# EAGLE board RFBoardLayoutGen0_v03.1 (EAGLE 7.2.0)
AUTHOR: Kirchschlager Raimund
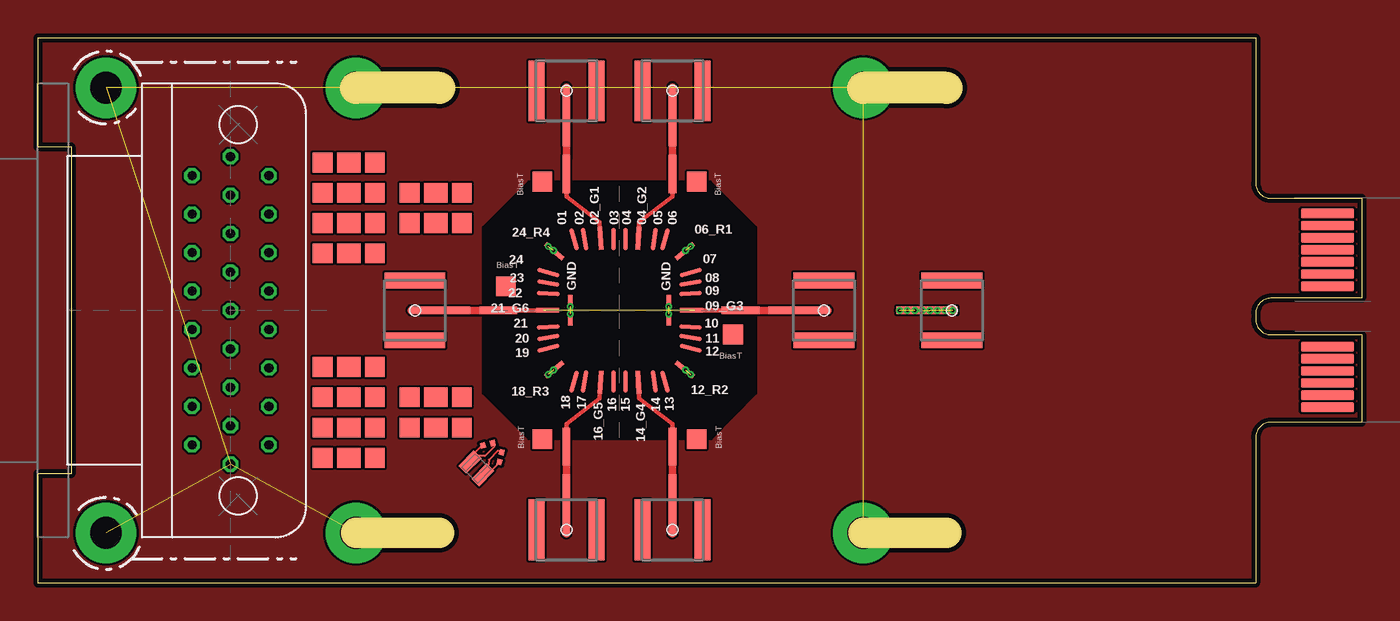
[diagram p0: board, top side]
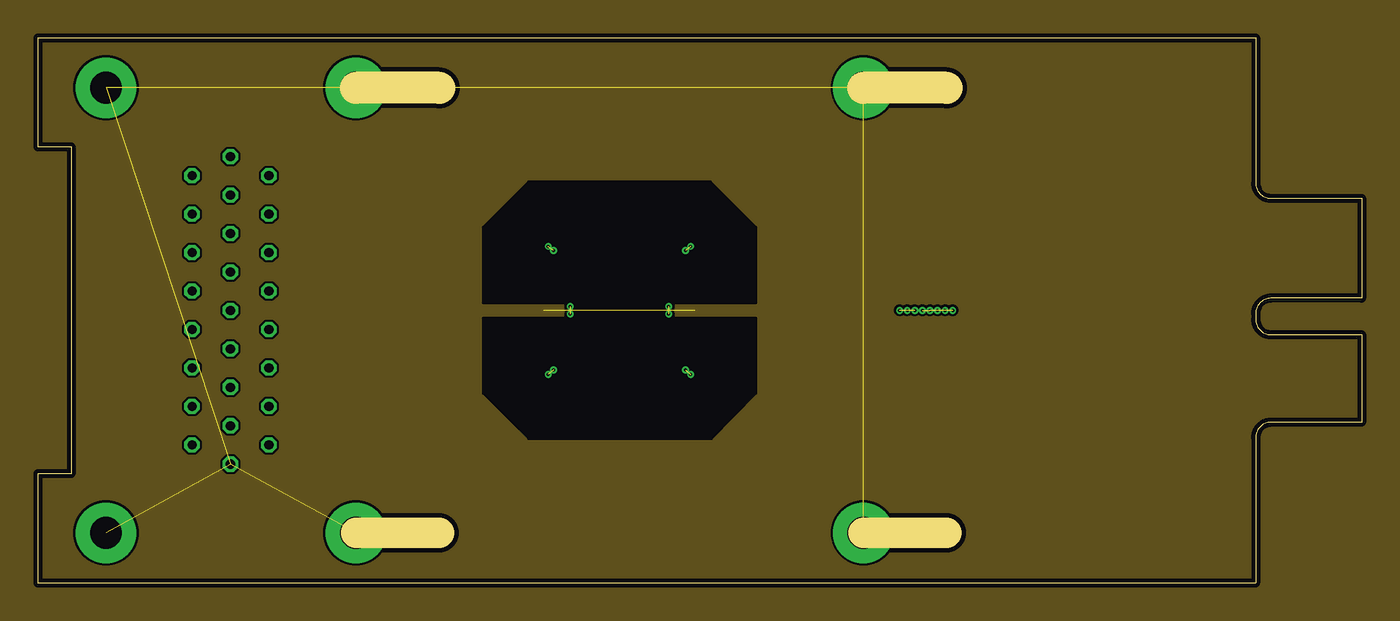
[diagram p1: board, inner layer Route2]
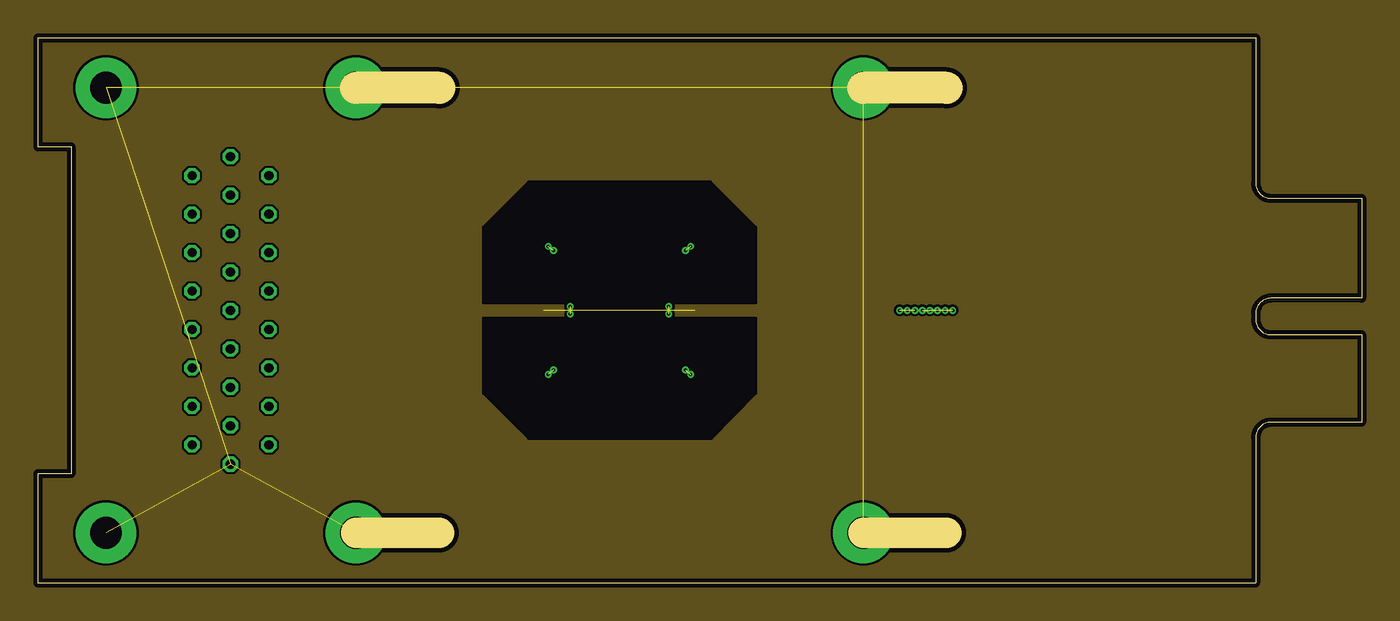
[diagram p2: board, inner layer Route3]
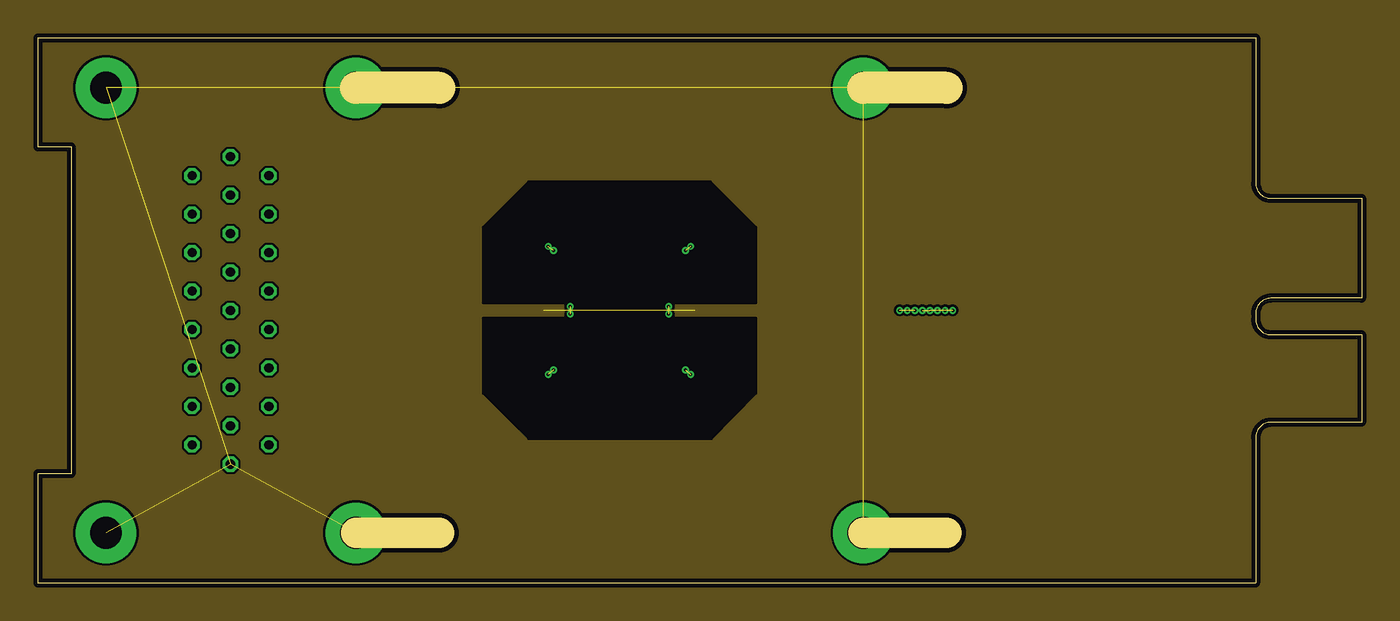
[diagram p3: board, inner layer Route14]
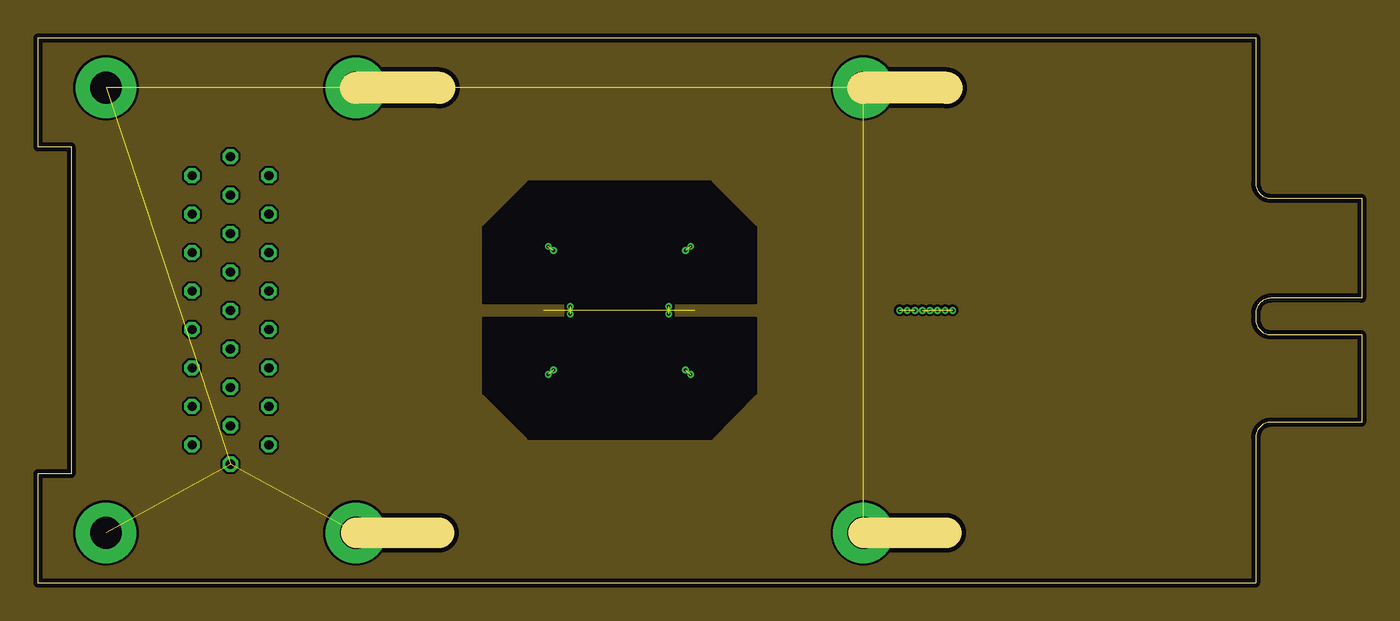
[diagram p4: board, inner layer Route15]
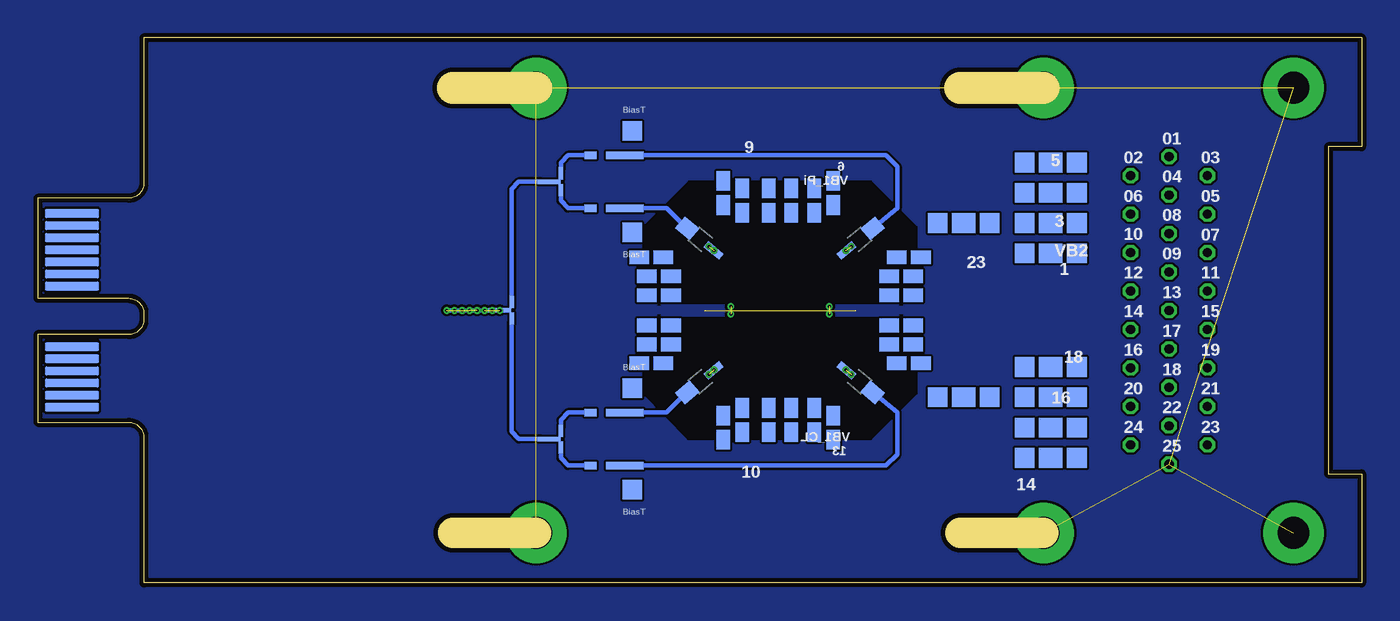
[diagram p5: board, bottom side, seen from below]

Size 87.4 x 36 mm. Coordinates in mm from the lower left corner, seen from the top.
Outline: 26.5,3.3 21,3.3
Outline: 26.5,32.7 21,32.7
Outline: 60,32.7 54.5,32.7
Outline: 60,3.3 54.5,3.3
Outline: 0,36 0,28.8 2.2,28.8 2.2,7.2 0,7.2 0,0 80.4,0 80.4,9.6 arc-90 81.4,10.6 87.4,10.6 87.4,16.4 81.4,16.4 arc-90 80.4,17.4 80.4,17.8 arc-90 81.4,18.8 87.4,18.8 87.4,25.4 81.4,25.4 arc-90 80.4,26.4 80.4,36 0,36
Copper layers (1+2+3*14+15+16): Top 0.035mm / dielectric 0.2mm / Route2 0.035mm / dielectric 0.36mm / Route3 0.035mm / dielectric 0.28mm / Route14 0.035mm / dielectric 0.36mm / Route15 0.035mm / dielectric 0.2mm / Bottom 0.035mm
Design rules "PCB-POOL HighSpec_ML6+": minimum track width 0.125mm, minimum drill 0.2mm, track to track 0.125mm, track to pad 0.125mm, pad to pad 0.125mm, via to via 0.125mm, smd to smd 0.125mm, copper to edge 0.3mm, drill to drill 0.2mm, minimum pad ring 0.2mm, minimum via ring 0.125mm, stop-mask expansion 0.075mm, vias tented up to drill 0.3mm, thermal gap 0.2mm
Net classes: 0 GND: clearance 0.15 mm; 1 RF: clearance 2 mm
tRestrict: area 29.4,9.5 to 47.4,26.5

## Footprints (pad centres in the part's own frame; a part is rotated, then mirrored left to right if it is on the bottom)
24DC+10RF/400MU-PADS/0.7X0.7_V1.0 = smd 1.5 x 0.3 rotated 40: P$1 -4.3,-3.9; P$2 4.3,3.9 | smd 1.5 x 0.3 rotated 140: P$3 -4.3,3.9; P$7 4.3,-3.9 | smd 1.5 x 0.3 rotated 165: P$4 4.7,-2.5 | smd 1.5 x 0.3 rotated 93: P$5 -1.25,4.75 | smd 1.5 x 0.3 rotated 171: P$6 4.7,-1.8 | smd 1.5 x 0.3: P$8 -4.75,0; P$23 4.75,0 | smd 1.5 x 0.3 rotated 177: P$9 4.7,-1.1 | smd 0.3 x 1.5: P$10 -0.4,4.7; P$14 -0.4,-4.7; P$19 0.4,-4.7; P$40 0.4,4.7 | smd 1.5 x 0.3 rotated 285: P$11 3,-4.7 | smd 1.5 x 0.3 rotated 87: P$12 1.25,4.75 | smd 1.5 x 0.3 rotated 279: P$13 2.3,-4.7 | smd 1.5 x 0.3 rotated 261: P$15 -2.3,-4.7 | smd 1.5 x 0.3 rotated 255: P$16 -3,-4.7 | smd 1.5 x 0.3 rotated 273: P$17 1.25,-4.75 | smd 1.5 x 0.3 rotated 267: P$18 -1.25,-4.75 | smd 1.5 x 0.3 rotated 183: P$20 4.7,1.1 | smd 1.5 x 0.3 rotated 189: P$21 4.7,1.8 | smd 1.5 x 0.3 rotated 195: P$22 4.7,2.5 | smd 0.3 x 2: P$24 -3.25,0; P$32 3.25,0 | smd 1.5 x 0.3 rotated 345: P$26 -4.7,2.5 | smd 1.5 x 0.3 rotated 351: P$27 -4.7,1.8 | smd 1.5 x 0.3 rotated 357: P$28 -4.7,1.1 | smd 1.5 x 0.3 rotated 3: P$29 -4.7,-1.1 | smd 1.5 x 0.3 rotated 9: P$30 -4.7,-1.8 | smd 1.5 x 0.3 rotated 15: P$31 -4.7,-2.5 | smd 1.5 x 0.3 rotated 105: P$38 -3,4.7 | smd 1.5 x 0.3 rotated 99: P$39 -2.3,4.7 | smd 1.5 x 0.3 rotated 81: P$41 2.3,4.7 | smd 1.5 x 0.3 rotated 75: P$42 3,4.7
25_SOCKET_M83513/13-D = drill 0.6 octagon: 01 10.16,0; 02 8.89,2.54; 03 6.35,2.54; 04 3.81,2.54; 05 2.54,0; 06 1.27,2.54; 07 0,0; 08 -1.27,2.54; 09 -2.54,0; 10 -3.81,2.54; 11 -6.35,2.54; 12 -8.89,2.54; 13 -10.16,0; 14 8.89,-2.54; 15 7.62,0; 16 6.35,-2.54; 17 5.08,0; 18 3.81,-2.54; 19 1.27,-2.54; 20 -1.27,-2.54; 21 -3.81,-2.54; 22 -5.08,0; 23 -6.35,-2.54; 24 -7.62,0; 25 -8.89,-2.54
MEC8-113-02-L-D-RA1 = smd 0.6 x 3.5: 129 -6.4,0.15; 130 -5.6,0.15; 131 -4.8,0.15; 132 -4,0.15; 133 -3.2,0.15; 134 -2.4,0.15; 135 -1.6,0.15; 136 2.4,0.15; 137 3.2,0.15; 138 4,0.15; 139 4.8,0.15; 140 5.6,0.15; 141 6.4,0.15 | smd 0.6 x 3.5 bottom: 157 -6.4,0.15; 158 -5.6,0.15; 159 -4.8,0.15; 160 -4,0.15; 161 -3.2,0.15; 162 -2.4,0.15; 163 -1.6,0.15; 168 2.4,0.15; 169 3.2,0.15; 170 4,0.15; 171 4.8,0.15; 172 5.6,0.15; 173 6.4,0.15
LP-FILTER/1_STAGE/OS/0603_TOP = smd 1.3 x 1.3: $1 1.85,0.01; $6 -1.6,0.01 | smd 1.55 x 1.3: $4 0.125,0.01
BIAS_TEE_UP_0603 = smd 1.3 x 1.3: P$1 0,-1.6 | smd 2.5 x 0.5: P$2 0.5,0
SMP_STRAIGHT_MINI = smd 0.5 x 4: 1 0,1.653 | smd 1.05 x 4: 2@1 -1.975,0; 2@2 1.975,0
BIAS_TEE_DOWN_0603 = smd 1.3 x 1.3: P$1 0,1.6 | smd 2.5 x 0.5: P$2 0.5,0
L_MATCH = smd 1.3 x 0.5: $1 -1.15,0 | smd 1.25 x 1: $3 1.125,0
LP-FILTER/1_STAGE/OS/0603_BOTTOM = smd 1.3 x 1.3 bottom: $1 -1.6,0.01; $6 1.85,0.01 | smd 1.55 x 1.3 bottom: $4 0.125,0.01
SMD0.8-0,5 = smd 0.8 x 0.5: 1 0,0
LP-FILTER/CAPACITOR/0603_BOTTOM = smd 1.3 x 0.9 bottom: $1 -0.8,0; $6 0.8,0
RX-BR_V1 = smd 1.422 x 0.711 rotated 45: P$2 -0.02,-0.87; P$3 -0.87,-0.02 | smd 0.406 x 0.406 rotated 165: P$5 1.23,0.63; P$8 1.08,-0.02 | smd 0.406 x 0.406 rotated 105: P$6 0.63,1.23; P$7 -0.02,1.08
T_JUNCTION_0.3MM = smd 0.3 x 1.5 bottom: P$1 0,-0.75 | smd 0.8 x 0.3 bottom: P$2 -0.55,0.03; P$3 0.55,0.03 | smd 1 x 0.12 bottom: P$4 0,-0.06

## Placement (x,y rotation side)
E$1  [24DC+10RF/400MU-PADS/0.7X0.7_V1.0]  38.4,18 0 top
E$2  [25_SOCKET_M83513/13-D]  12.71,18 90 top
E$3  [MEC8-113-02-L-D-RA1]  85,18 270 top
E$4  [LP-FILTER/1_STAGE/OS/0603_TOP]  20.4,27.75 0 top
E$5  [LP-FILTER/1_STAGE/OS/0603_TOP]  20.4,25.75 0 top
E$6  [LP-FILTER/1_STAGE/OS/0603_TOP]  20.4,23.75 0 top
E$7  [LP-FILTER/1_STAGE/OS/0603_TOP]  20.4,21.75 0 top
E$8  [LP-FILTER/1_STAGE/OS/0603_TOP]  20.4,14.25 0 top
E$9  [BIAS_TEE_UP_0603]  34.9,9.5 270 top
E$10  [SMP_STRAIGHT_MINI]  51.9,18 90 top
E$11  [LP-FILTER/1_STAGE/OS/0603_TOP]  20.4,12.25 0 top
E$12  [SMP_STRAIGHT_MINI]  24.9,18 270 top
E$13  [LP-FILTER/1_STAGE/OS/0603_TOP]  20.4,10.25 0 top
E$14  [LP-FILTER/1_STAGE/OS/0603_TOP]  20.4,8.25 0 top
E$15  [BIAS_TEE_UP_0603]  30.9,18 180 top
E$16  [BIAS_TEE_DOWN_0603]  41.9,9.5 270 top
E$17  [LP-FILTER/1_STAGE/OS/0603_TOP]  26.15,25.75 0 top
E$18  [LP-FILTER/1_STAGE/OS/0603_TOP]  26.15,10.25 0 top
E$19  [L_MATCH]  33.14,22.7 40 bottom
E$20  [LP-FILTER/1_STAGE/OS/0603_BOTTOM]  20.4,27.75 0 top
E$21  [LP-FILTER/1_STAGE/OS/0603_BOTTOM]  20.4,25.75 0 top
E$22  [LP-FILTER/1_STAGE/OS/0603_BOTTOM]  20.4,23.75 0 top
E$23  [LP-FILTER/1_STAGE/OS/0603_BOTTOM]  20.4,21.75 0 top
E$24  [LP-FILTER/1_STAGE/OS/0603_BOTTOM]  20.4,14.25 0 top
E$25  [LP-FILTER/1_STAGE/OS/0603_BOTTOM]  20.4,12.25 0 top
E$26  [SMP_STRAIGHT_MINI]  60.35,18 90 top
E$27  [L_MATCH]  33.14,13.3 320 bottom
E$28  [BIAS_TEE_UP_0603]  48.15,11.25 180 bottom
E$29  [SMP_STRAIGHT_MINI]  34.9,3.5 0 top
E$30  [SMD0.8-0,5]  50.9,11.25 0 bottom
E$31  [BIAS_TEE_DOWN_0603]  34.9,26.5 90 top
E$32  [SMP_STRAIGHT_MINI]  34.9,32.5 180 top
E$33  [SMP_STRAIGHT_MINI]  41.9,3.5 0 top
E$34  [BIAS_TEE_UP_0603]  41.9,26.5 90 top
E$35  [LP-FILTER/CAPACITOR/0603_BOTTOM]  34.9,25.75 270 top
E$36  [SMP_STRAIGHT_MINI]  41.9,32.5 180 top
E$37  [BIAS_TEE_UP_0603]  45.9,18 0 top
E$38  [LP-FILTER/CAPACITOR/0603_BOTTOM]  36.15,25.25 270 top
E$39  [LP-FILTER/CAPACITOR/0603_BOTTOM]  37.65,25.25 270 top
E$40  [RX-BR_V1]  29.4,8 0 top
E$41  [LP-FILTER/CAPACITOR/0603_BOTTOM]  29.9,21.5 180 top
E$42  [LP-FILTER/CAPACITOR/0603_BOTTOM]  30.4,20.25 180 top
E$43  [LP-FILTER/CAPACITOR/0603_BOTTOM]  39.15,25.25 270 top
E$44  [LP-FILTER/CAPACITOR/0603_BOTTOM]  30.4,19 180 top
E$45  [LP-FILTER/CAPACITOR/0603_BOTTOM]  30.4,17 180 top
E$46  [LP-FILTER/CAPACITOR/0603_BOTTOM]  30.4,15.75 180 top
E$47  [LP-FILTER/CAPACITOR/0603_BOTTOM]  29.9,14.5 180 top
E$48  [T_JUNCTION_0.3MM]  52.9,9.5 90 top
E$49  [LP-FILTER/CAPACITOR/0603_BOTTOM]  40.9,25.25 270 top
E$50  [T_JUNCTION_0.3MM]  56.15,18 90 top
E$51  [T_JUNCTION_0.3MM]  52.9,26.5 90 top
E$52  [BIAS_TEE_DOWN_0603]  48.15,7.75 180 bottom
E$53  [LP-FILTER/CAPACITOR/0603_BOTTOM]  42.15,25.75 270 top
E$54  [L_MATCH]  43.66,13.3 220 bottom
E$55  [BIAS_TEE_UP_0603]  48.15,28.25 180 bottom
E$56  [L_MATCH]  43.66,22.7 140 bottom
E$57  [SMD0.8-0,5]  50.9,7.75 0 bottom
E$58  [SMD0.8-0,5]  50.9,11.25 0 bottom
E$59  [BIAS_TEE_DOWN_0603]  48.15,24.75 180 bottom
E$60  [LP-FILTER/CAPACITOR/0603_BOTTOM]  34.9,10.25 270 top
E$61  [LP-FILTER/CAPACITOR/0603_BOTTOM]  36.15,10.75 270 top
E$62  [SMD0.8-0,5]  50.9,24.75 0 bottom
E$63  [SMD0.8-0,5]  50.9,28.25 0 bottom
E$64  [LP-FILTER/CAPACITOR/0603_BOTTOM]  37.65,10.75 270 top
E$65  [LP-FILTER/CAPACITOR/0603_BOTTOM]  39.15,10.75 270 top
E$66  [LP-FILTER/CAPACITOR/0603_BOTTOM]  40.9,10.75 270 top
E$67  [LP-FILTER/CAPACITOR/0603_BOTTOM]  42.15,10.25 270 top
E$68  [LP-FILTER/CAPACITOR/0603_BOTTOM]  46.9,21.5 180 top
E$69  [LP-FILTER/CAPACITOR/0603_BOTTOM]  46.4,20.25 180 top
E$70  [LP-FILTER/CAPACITOR/0603_BOTTOM]  46.4,19 180 top
E$71  [LP-FILTER/CAPACITOR/0603_BOTTOM]  46.4,17 180 top
E$72  [LP-FILTER/CAPACITOR/0603_BOTTOM]  46.4,15.75 180 top
E$73  [LP-FILTER/CAPACITOR/0603_BOTTOM]  46.9,14.5 180 top
E$74  [LP-FILTER/1_STAGE/OS/0603_BOTTOM]  20.4,10.25 0 top
E$75  [LP-FILTER/1_STAGE/OS/0603_BOTTOM]  20.4,8.25 0 top
E$76  [LP-FILTER/1_STAGE/OS/0603_TOP]  26.15,23.75 0 top
E$77  [LP-FILTER/1_STAGE/OS/0603_BOTTOM]  26.15,12.25 0 top
E$78  [LP-FILTER/1_STAGE/OS/0603_BOTTOM]  26.15,12.25 0 top
E$79  [LP-FILTER/1_STAGE/OS/0603_BOTTOM]  26.15,23.75 0 top
E$80  [LP-FILTER/1_STAGE/OS/0603_TOP]  26.15,12.25 0 top
E$81  [LP-FILTER/1_STAGE/OS/0603_BOTTOM]  26.15,23.75 0 top

## Library data of the parts
E$1 = SampleArea
E$2 = Glenair
E$3 = MEC8-130-02-X-D-RA1
E$4-E$8 E$11 E$13 E$14 E$17 E$18 E$20-E$25 E$35 E$38 E$39 E$41-E$47 E$49 E$53 E$60 E$61 E$64-E$81 = LPFilter
E$9 E$15 E$16 E$28 E$31 E$34 E$37 E$52 E$55 E$59 = Bias tee
E$10 E$12 E$26 E$29 E$32 E$33 E$36 = RF Connectors
E$19 E$27 E$54 E$56 = MatchCircuit
E$30 E$57 E$58 E$62 E$63 = PADS
E$40 = TempSensors
E$48 E$50 E$51 = RF layout parts

## Nets
S$2 [RF]: E$63.1
S$17 [RF]: E$62.1
S$67: E$2.24
S$76: E$2.11
S$80: E$2.12
S$81 [RF]: E$58.1
S$83: E$2.23
S$84 [RF]: E$57.1
S$85: E$2.25
S$88: E$2.01
S$90: E$2.10
S$95: E$2.22
S$144: E$2.14
S$146: E$2.02
S$149: E$2.15
S$151: E$2.03
S$154: E$2.09
S$156: E$2.21
S$158: E$2.08
S$160: E$2.20
S$162: E$2.16
S$163 [RF]: E$1.P$12
S$168: E$2.17
S$170: E$2.05
S$171: E$2.07
S$174: E$2.13
S$175: E$2.06
S$178: E$2.18
S$183: E$3.168
S$190: E$3.130

## Tracks (layer width: path | path; a pad name or v marks a point on that pad's centre or on a via)
GND1
  pour Top (rank 6): -4.85,39.6 92.1,39.7 92.1,-4.7 -4.85,-4.8
  pour Route2 (rank 6): -7.5,41.1 92.6,41.6 92.6,-5.15 -7.5,-5.65
  pour Route15 (rank 6): -11.25,44.5 94.9,44.5 94.9,-11.4 -11.25,-11.4
  pour Bottom (rank 6): -16.65,49.3 97.15,49.2 97.15,-15.85 -16.65,-15.75
  pour Route3 (rank 6): -15.4,47.8 96.4,47.8 96.4,-13.85 -15.4,-13.75
  pour Route14 (rank 6): -12.9,45.3 95.9,45.2 95.9,-12.85 -12.9,-12.75
S$1  (via drill 0.2)  (6 unrouted)
  Bottom 0.3: v56.9,18 v60.4,18
  other vias: 57.4,18 57.9,18 58.4,18 58.9,18 59.4,18 59.9,18
S$2
  Bottom 0.3: E$63.1 52.4,28.25 52.87,27.75 52.87,27.25
S$12
  Bottom 0.3: 49.65,24.75 45.9,24.75 44.65,23.5
S$17
  Bottom 0.3: 52.87,25.75 52.87,25.25 52.4,24.75 E$62.1
S$55
  Bottom 0.3: 54.15,26.5 55.65,26.5 56.12,26 56.12,18.75
S$68
  Bottom 0.3: 49.65,28.25 31.4,28.25 30.65,27.5 30.65,24.75 32.15,23.5
S$79
  Bottom 0.3: 49.65,11.25 45.9,11.25 44.65,12.5
S$81
  Bottom 0.3: E$58.1 52.4,11.25 52.87,10.75 52.87,10.25
S$82
  Top 0.5: 60.4,18 56.9,18
S$84
  Bottom 0.3: E$57.1 52.4,7.75 52.87,8.25 52.87,8.75
S$86
  Bottom 0.3: 54.15,9.5 55.65,9.5 56.12,10 56.12,17.25
S$89
  Bottom 0.3: 49.65,7.75 31.4,7.75 30.65,8.5 30.65,11.25 32.15,12.5
S$91
  Top 0.5: 24.65,18 29.65,18
S$116
  Top 0.5: 52.15,18 47.15,18
S$145
  Top 0.5: 34.9,32.75 34.9,28
S$147
  Top 0.5: 41.9,32.75 41.9,28
S$150
  Top 0.5: 34.9,3.25 34.9,8
S$152
  Top 0.5: 41.9,3.25 41.9,8
S$155
  Top 0.3: 34.9,28 34.9,25.5 37.09,23.83 37.15,22.75
S$157
  Top 0.3: 37.15,13.25 37.09,12.17 34.9,10.5 34.9,8
S$159  (1 unrouted)
  Top 0.3: 29.65,18 33.4,18 | 43.4,18 47.15,18
S$161
  Top 0.3: 39.65,13.25 39.7,12.17 41.9,10.5
S$163
  Top 0.3: 41.9,28 41.9,25.5 39.7,23.83 E$1.P$12
S$164
  Top 0.3: 41.9,10.5 41.9,8
S$165
  cutout Route2: 44.46,9.51 42.9,9.5 32.4,9.5 29.4,12.5 29.4,17.5 35.4,17.5 35.4,18.5 29.4,18.5 29.4,23.5 32.4,26.5 44.4,26.5 47.4,23.5 47.4,18.5 41.4,18.5 41.4,17.5 47.4,17.5 47.4,12.5
  cutout Route3: 44.46,9.51 42.9,9.5 32.4,9.5 29.4,12.5 29.4,17.5 35.4,17.5 35.4,18.5 29.4,18.5 29.4,23.5 32.4,26.5 44.4,26.5 47.4,23.5 47.4,18.5 41.4,18.5 41.4,17.5 47.4,17.5 47.4,12.5
  cutout Route14: 44.46,9.51 42.9,9.5 32.4,9.5 29.4,12.5 29.4,17.5 35.4,17.5 35.4,18.5 29.4,18.5 29.4,23.5 32.4,26.5 44.4,26.5 47.4,23.5 47.4,18.5 41.4,18.5 41.4,17.5 47.4,17.5 47.4,12.5
  cutout Route15: 44.46,9.51 42.9,9.5 32.4,9.5 29.4,12.5 29.4,17.5 35.4,17.5 35.4,18.5 29.4,18.5 29.4,23.5 32.4,26.5 44.4,26.5 47.4,23.5 47.4,18.5 41.4,18.5 41.4,17.5 47.4,17.5 47.4,12.5
  cutout Top: 44.46,9.51 42.9,9.5 32.4,9.5 29.4,12.5 29.4,17.5 35.4,17.5 35.4,18.5 29.4,18.5 29.4,23.5 32.4,26.5 44.4,26.5 47.4,23.5 47.4,18.5 41.4,18.5 41.4,17.5 47.4,17.5 47.4,12.5
  cutout Bottom: 44.46,9.51 42.9,9.5 32.4,9.5 29.4,12.5 29.4,17.5 35.4,17.5 35.4,18.5 29.4,18.5 29.4,23.5 32.4,26.5 44.4,26.5 47.4,23.5 47.4,18.5 41.4,18.5 41.4,17.5 47.4,17.5 47.4,12.5
S$167  (via drill 0.2)  (1 unrouted)
  other vias: 33.7,22.23 33.7,22.23 34.04,21.94
S$169  (via drill 0.2)  (1 unrouted)
  other vias: 33.7,13.77 34.04,14.06
S$172  (via drill 0.2)  (1 unrouted)
  other vias: 43.1,13.77 42.76,14.06
S$173  (via drill 0.2)  (1 unrouted)
  other vias: 42.76,21.94 43.1,22.23 43.1,22.23
S$174  (via drill 2.1 pad 4)  (6 unrouted)
  other vias: 54.5,3.3 21,32.7 4.5,32.7 21,3.3 54.5,32.7 4.5,3.3
S$176  (via drill 0.2)  (1 unrouted)
  other vias: 41.65,17.75 41.65,18.25
S$177  (via drill 0.2)  (1 unrouted)
  other vias: 35.15,17.75 35.15,18.25
S$192
  Top 0.125: 30.52,8 29.77,7.25
S$197
  Top 0.125: 29.65,7.25 29.77,8.12 30.4,8.75 30.65,8.62
S$198
  Top 0.125: 29.27,9 28.65,8.38
S$200
  Top 0.125: 28.9,8.38 29.52,8.38 30.15,9 30.02,9.25

## Text on the board
tPlace: 4 | 2 | 22 | 24 | 11 | 19 | 21 | 8 | 17 | DESIGN BY J.K. & R.K. | GROUP G. KATSAROS | 15 | RF-BOARD V2.2 / safe ver
bPlace: 01 | 03 | 02 | 5 | 9 | 04 | 05 | 06 | 08 | 6 / VB1_Pi | 3 | 07 | 10 | 09 | 11 | 12 | 23 | 13 | VB2 / 1 | 15 | 14 | 17 | 19 | 16 | 18 | 18 | 21 | 20 | 22 | 16 | 23 | 24 | 25 | VB1_CL / 13 | 10 | 14